# Altium PCB CBCM PCB Rev 1.PcbDoc
Units mm, origin at the board's own origin, x right, y up, seen from the top; angles counter-clockwise.
Board outline 102 x 53 mm, 4 copper layers (Component Side, Power, Ground, Solder Side), stack 0.651 mm thick; 35 components, 59 nets, 239 pads, 28 vias.
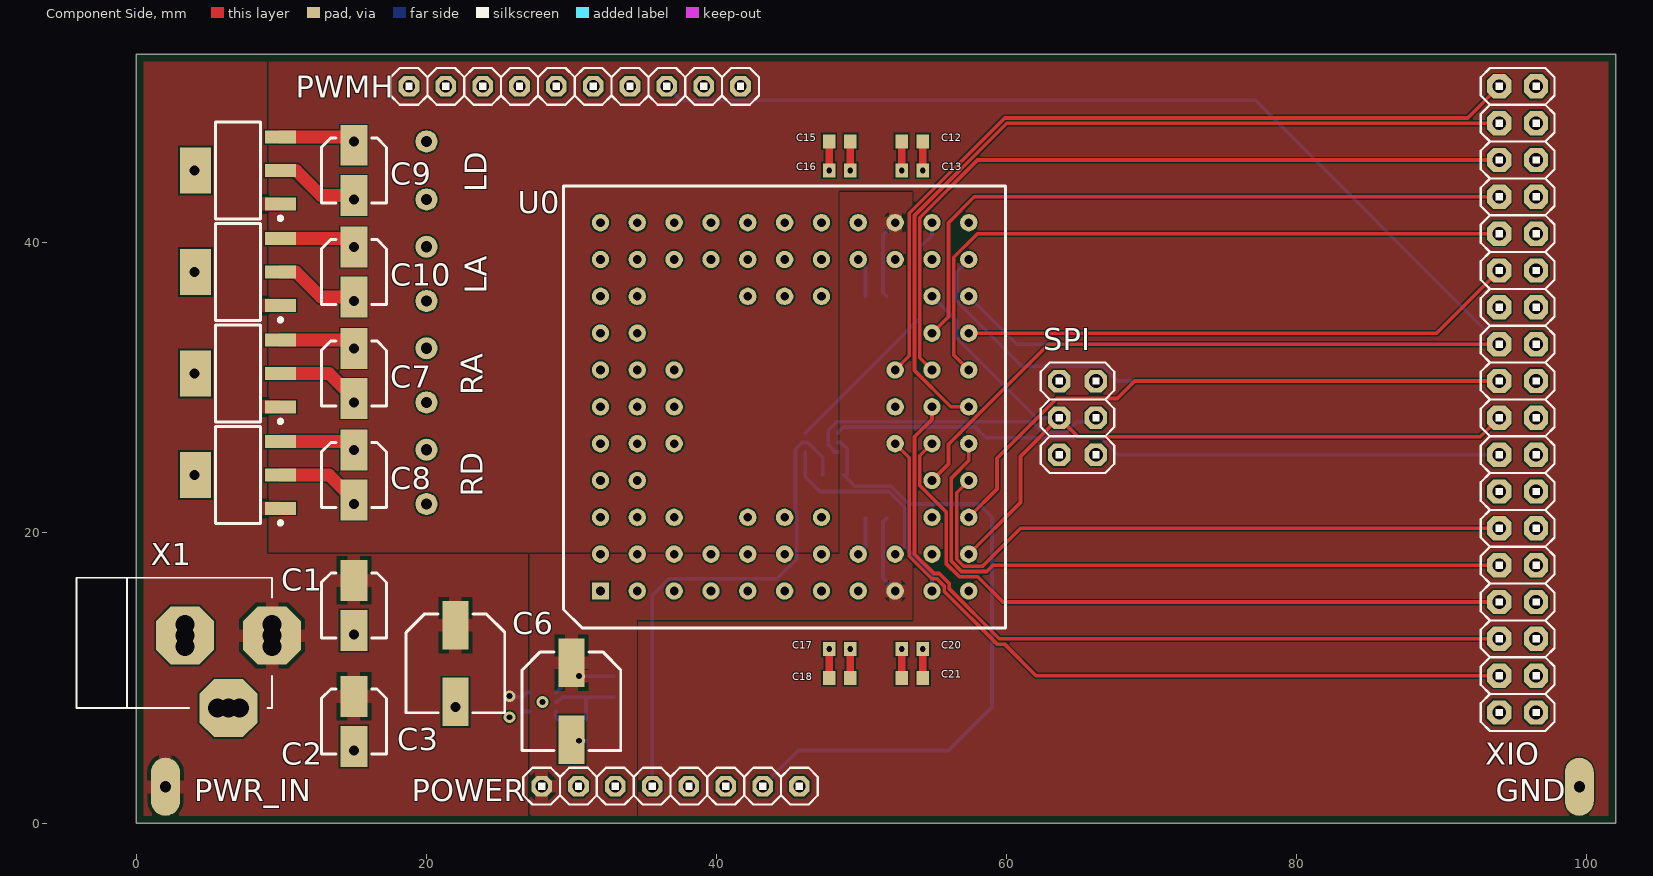
[diagram p0: Component Side view]
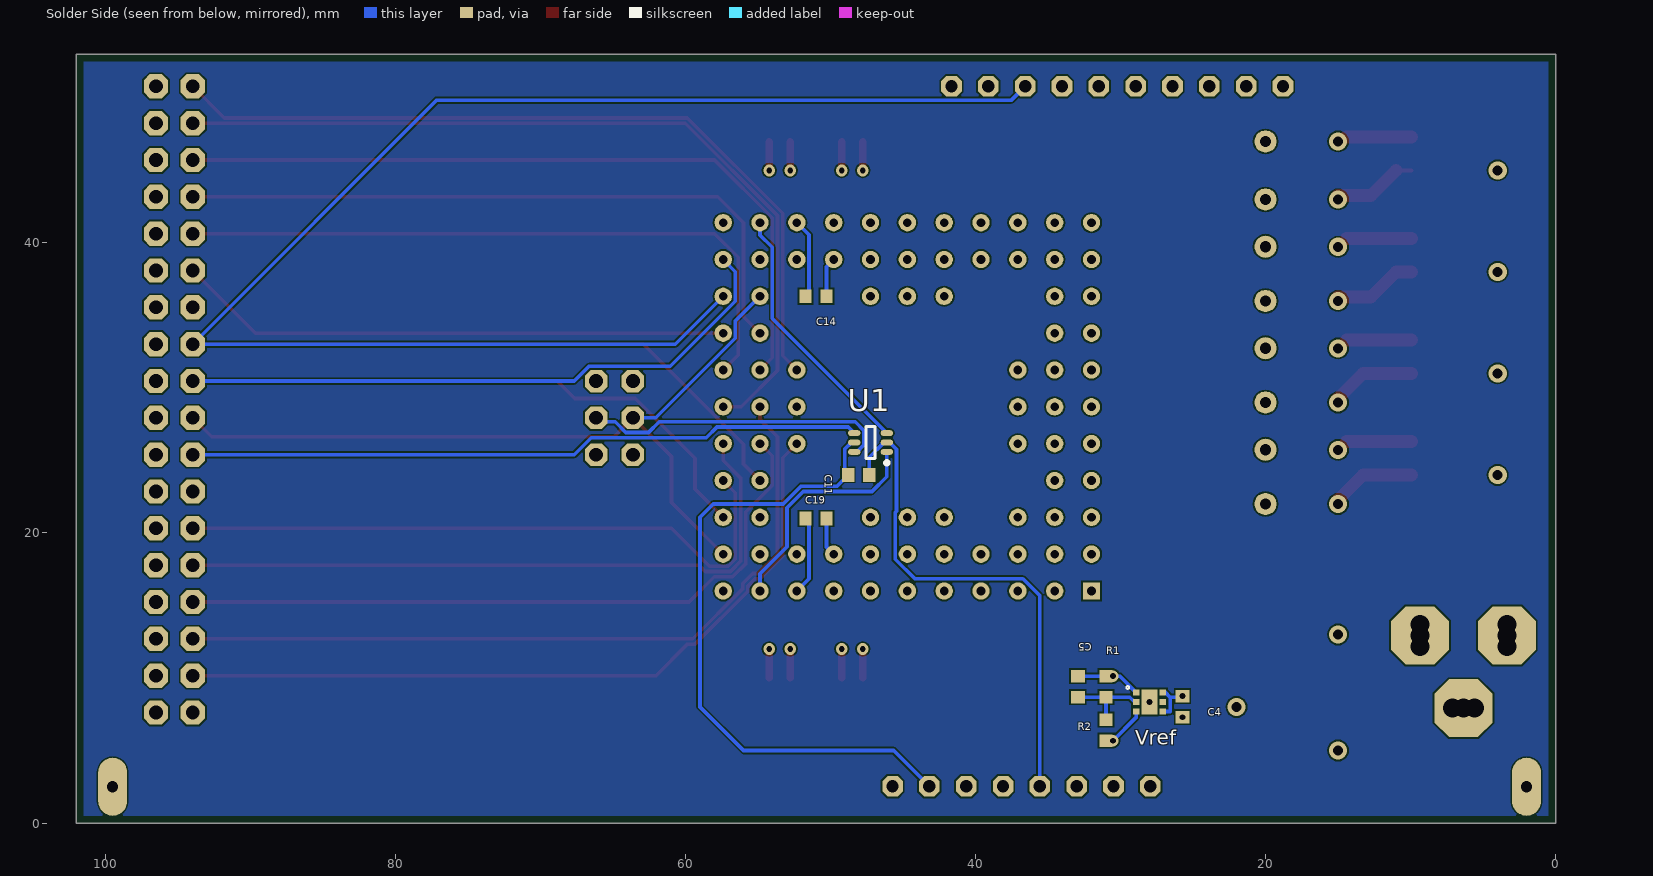
[diagram p1: Solder Side view, seen from below]
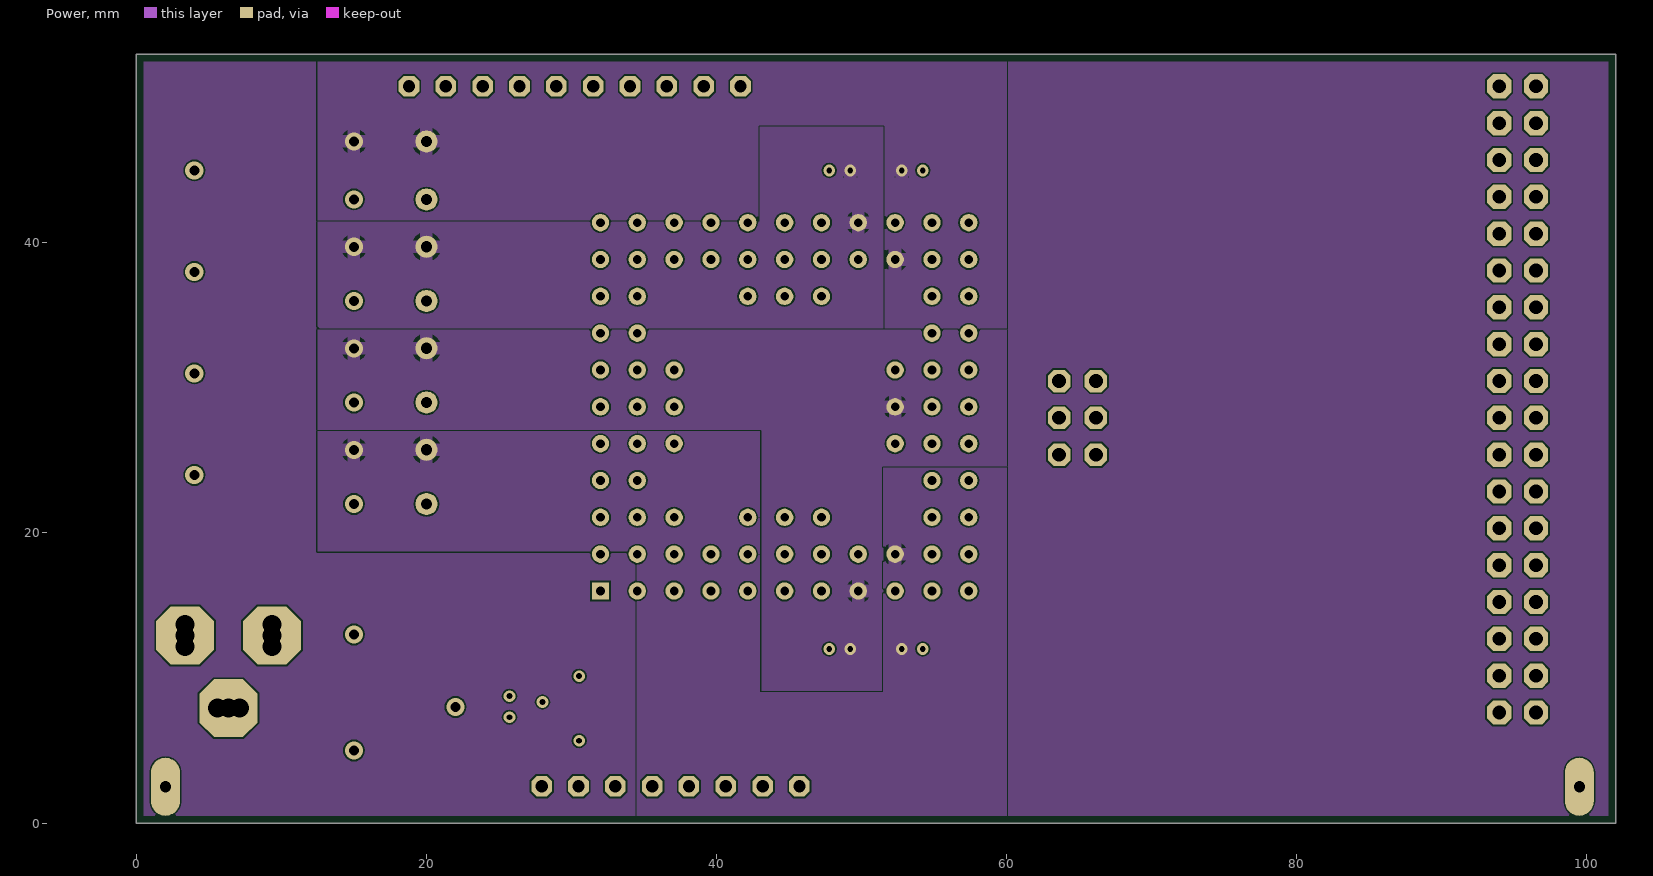
[diagram p2: Power]
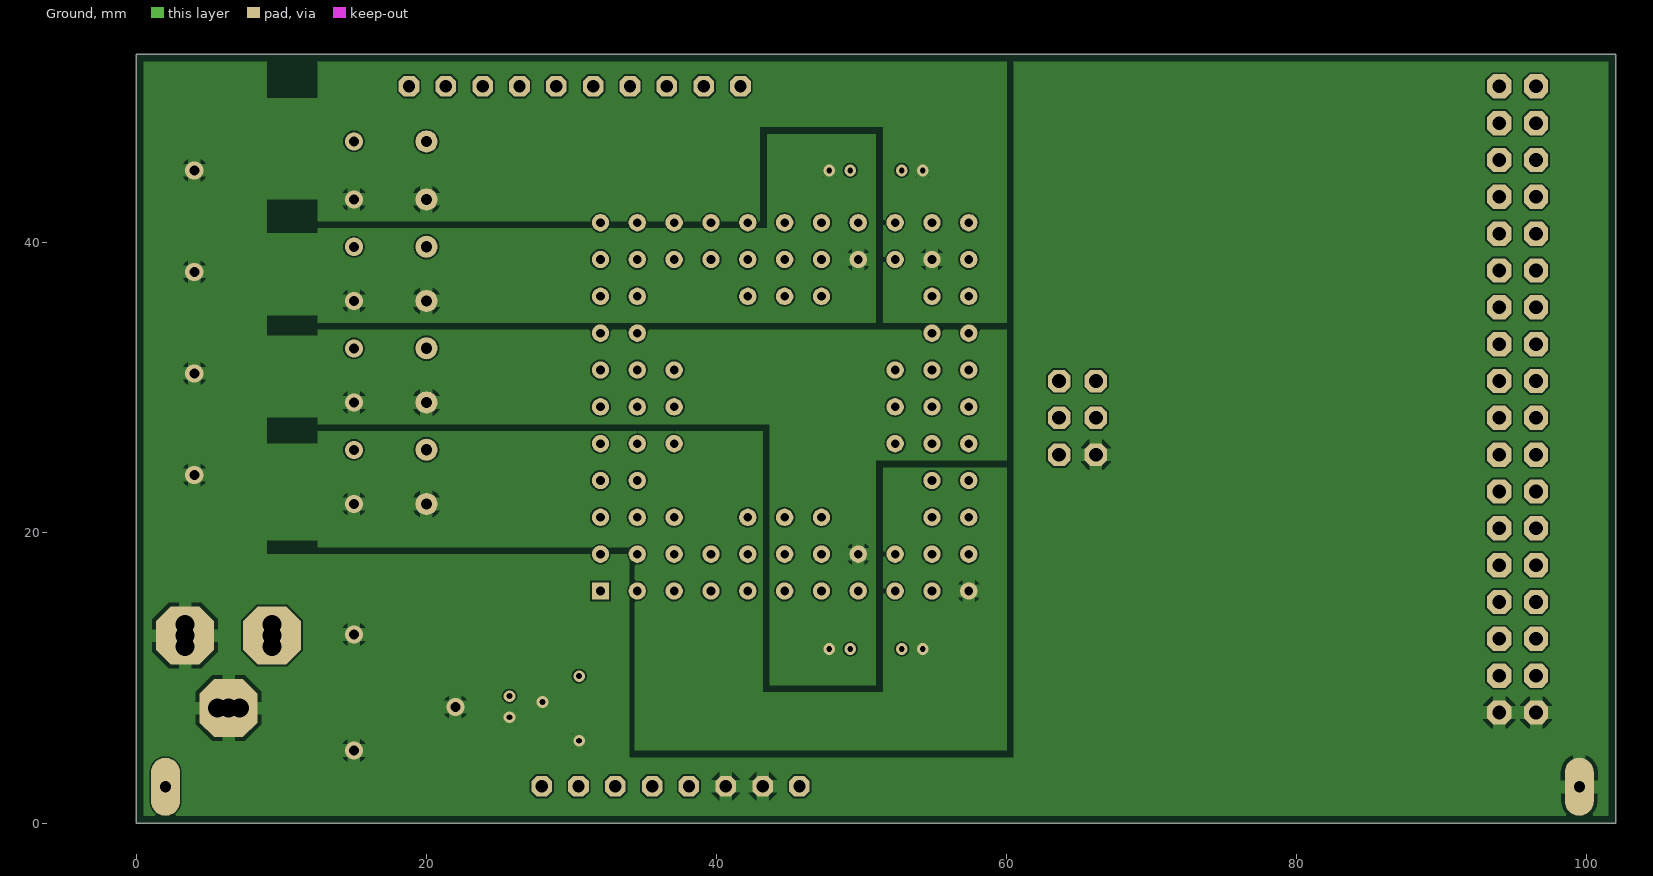
[diagram p3: Ground]
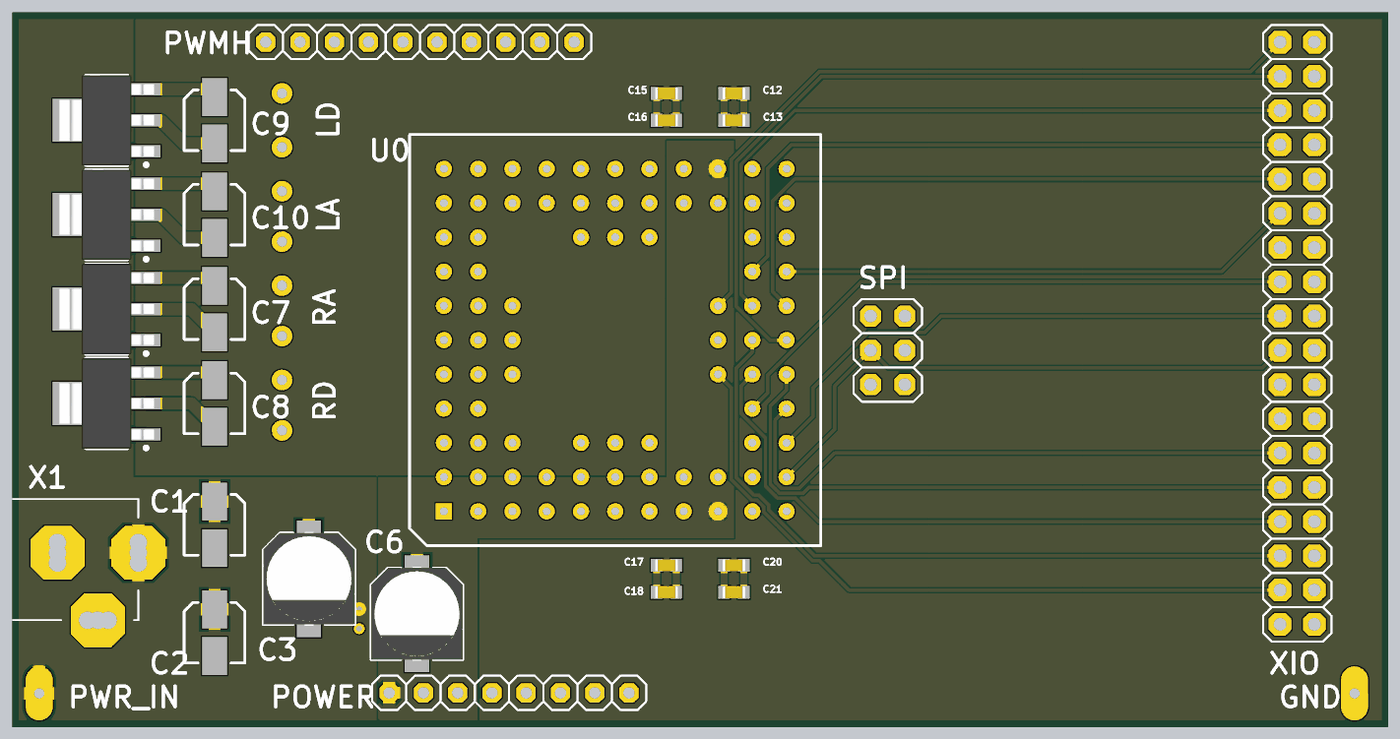
[diagram p4: 3D render of the assembled board from above, using the file's embedded part models]
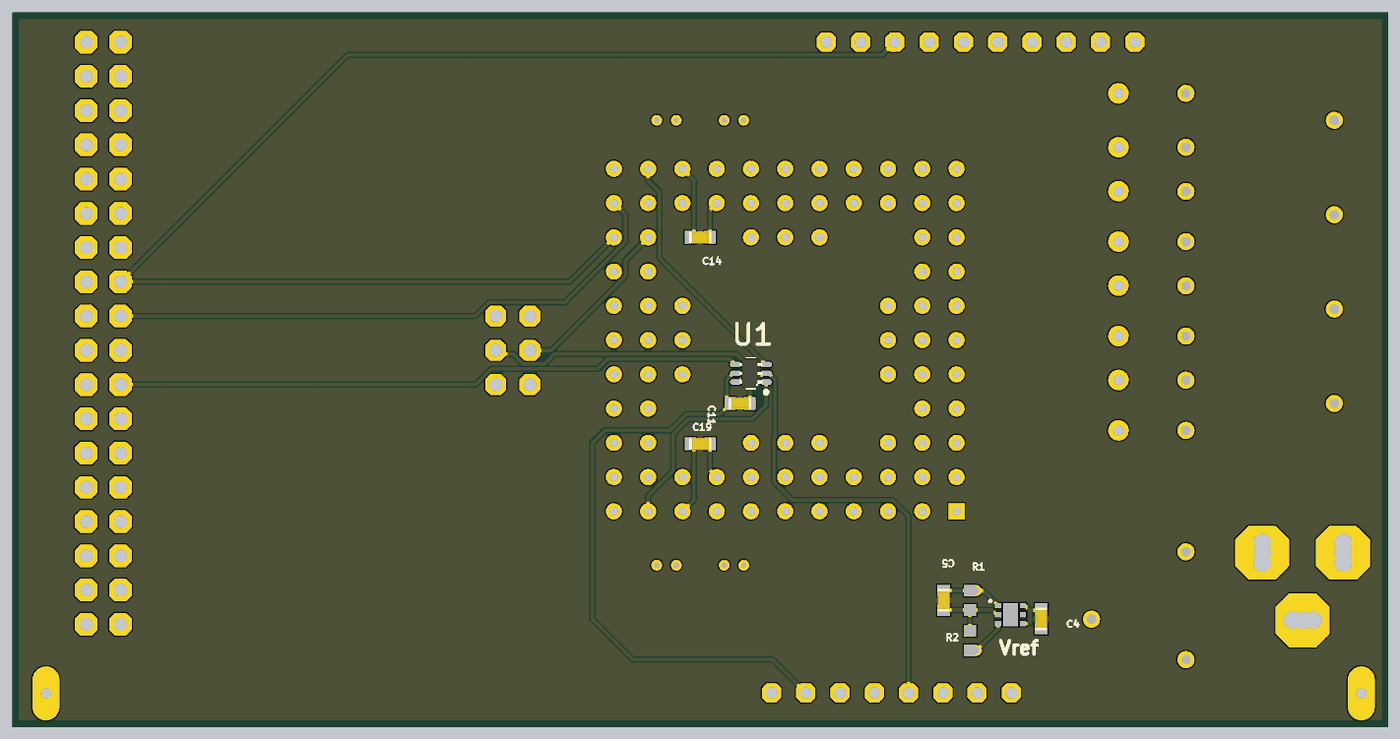
[diagram p5: 3D render of the assembled board from below, using the file's embedded part models]

## Layer stack, top to bottom
Top Solder: solder mask 0.0102, Solder Resist, Dk 3.5
Component Side: signal copper 0.0356
Dielectric 1: prepreg 0.127, Dk 4.2
Power: signal copper 0.036
Dielectric 3: core 0.254, FR-4, Dk 4.2
Ground: signal copper 0.036
Dielectric 2: prepreg 0.127, Dk 4.2
Solder Side: signal copper 0.0356
Bottom Solder: solder mask 0.0102, Solder Resist, Dk 3.5

## Board outline
0,0 102,0 102,53 0,53

## Design rules (kind name [scope] priority, off if disabled: settings)
Clearance [All] p1: gap=0.11 ignorepadtopadclearanceinfootprint=FALSE except(0: Arc-Hole Track-Hole SMDPad-Hole THPad-Hole Via-Hole Fill-Hole Poly-Hole Region-Hole Text-Hole)
PolygonConnect [All] p1: connectstyle=Relief reliefconductorwidth=0.9 reliefentries=4 polygonreliefangle="90 Angle" airgapwidth=0.254
RoutingVias [All] p1: holewidth=0.711 width=1.27 viastyle="Through Hole" minholewidth=0.711 minwidth=1.27 maxholewidth=0.711 maxwidth=1.27
SolderMaskExpansion [All] p1: expansion=0.102
Width [All] p1: maxlimit=2 minlimit=0.16 preferedwidth=0.254 midlayer1_maxwidth=0.254 midlayer2_maxwidth=0.254 minimp=50.000000 maximp=50.000000 favimp=50.000000
30 further rules are at their usual default settings.

## Components (designator, comment, footprint, x,y, rotation, side; value= is the part's Value field where it differs from the comment)
C1 "10uF" CAPAE4643X55M 15,15 r270 top
C2 "47uF" CAPAE4643X55M 15,7 r270 top
C3 "100uF" CAPAE7066X77M 22,11 r270 top
C4 "1uF" CAPC1608X09N 25.725,8.024 r270 bottom
C5 "10nF" CAPC1608X09N 32.94,9.404 r90 bottom
C6 "100uF" CAPAE7066X77M 30,8.404 r270 top
C7 "10uF" CAPAE4643X55M 15,31 r270 top
C8 "10uF" CAPAE4643X55M 15,24 r270 top
C9 "10uF" CAPAE4643X55M 15,45 r270 top
C10 "10uF" CAPAE4643X55M 15,38 r270 top
C11 "0.1uF" CAPC1608X09N 48.054,24 r180 bottom
C12 "0.1uF" CAPC1608X09N 53.5,47 r0 top
C13 "1uF" CAPC1608X09N 53.5,45 r0 top
C14 "1uF" CAPC1608X09N 51,36.32 r0 bottom
C15 "0.1uF" CAPC1608X09N 48.5,47 r180 top
C16 "1uF" CAPC1608X09N 48.5,45 r180 top
C17 "1uF" CAPC1608X09N 48.5,12 r0 top
C18 "0.1uF" CAPC1608X09N 48.5,10 r0 top
C19 "1uF" CAPC1608X09N 51,21 r180 bottom
C20 "1uF" CAPC1608X09N 53.5,12 r180 top
C21 "0.1uF" CAPC1608X09N 53.5,10 r180 top
LA "UA78M33QDCYRQ1" SOT230P700X180-4N 7,38 r180 top (schematic designator LAVDD)
LD "UA78M33QDCYRQ1" SOT230P700X180-4N 7,45 r180 top (schematic designator LDVDD)
POWER "8x1F-H8.5" 1X08 36.83,2.54 r0 top locked
PWMH "10x1F-H8.5" 1X10 30.226,50.8 r180 top locked
R1 "130k" RESC1608X09N 31,9.404 r90 bottom
R2 "98.8k" RESC1608X09N 31,6.404 r90 bottom
RA "UA78M33QDCYRQ1" SOT230P700X180-4N 7,31 r180 top (schematic designator RAVDD)
RD "UA78M33QDCYRQ1" SOT230P700X180-4N 7,24 r180 top (schematic designator RDVDD)
SPI "3x2M" 2X03 64.897,27.94 r270 top locked
U0 "CBCM IC" PGA85x11 32,16 r90 top locked
U1 "TMUX1247" TSOP65P210X110-6N 47.24,26.24 r0 bottom
Vref "NCP705MTADJTCG" WDFN6 28,8.344 r270 bottom
X1 "POWERSUPPLY_DC21MMX" POWERSUPPLY_DC-21MM 3,13 r90 top
XIO "18x2F-H8.5" 2X18 95.25,29.21 r270 top locked

## Footprints (in the part's own frame and the unit in brackets; to place one, negate y for a bottom-side part, rotate by r counter-clockwise, add the part's x,y. Pads: shape width x height; smd on the part's side, far side on the other; paste and mask are expansions set on the pad)
1X08 [mil]
  oct 56x56 hole 33.46: 1(-350,0) 2(-250,0) 3(-150,0) 4(-50,0) 5(50,0) 6(150,0) 7(250,0) 8(350,0)
  silkscreen extent -400,-50 400,50
1X10 [mil]
  oct 56x56 hole 33.46: 1(-450,0) 2(-350,0) 3(-250,0) 4(-150,0) 5(-50,0) 6(50,0) 7(150,0) 8(250,0) 9(350,0) 10(450,0)
  silkscreen extent -500,-50 500,50
2X03 [mm]
  oct 1.55x1.55 hole 0.95: 1(-2.54,-1.27) 2(-2.54,1.27) 3(0,-1.27) 4(0,1.27) 5(2.54,-1.27) 6(2.54,1.27)
  silkscreen extent -3.81,-2.54 3.81,2.54
2X18 [mil]
  oct 66x66 hole 37.4: 1(-850,-50) 2(-850,50) 3(-750,-50) 4(-750,50) 5(-650,-50) 6(-650,50) 7(-550,-50) 8(-550,50) 9(-450,-50) 10(-450,50) 11(-350,-50) 12(-350,50) 13(-250,-50) 14(-250,50) 15(-150,-50) 16(-150,50) 17(-50,-50) 18(-50,50) 19(50,-50) 20(50,50) 21(150,-50) 22(150,50) 23(250,-50) 24(250,50) 25(350,-50) 26(350,50) 27(450,-50) 28(450,50) 29(550,-50) 30(550,50) 31(650,-50) 32(650,50) 33(750,-50) 34(750,50) 35(850,-50) 36(850,50)
  silkscreen extent -900,-100 900,100
CAPAE4643X55M [mm] "Aluminum Electrolytic Capacitor, Body 4.30x4.30x5.50mm, IPC Low Density"
  rect 2.8x1.85 smd: 1(-1.725,0) 2(1.725,0)
  silkscreen extent -2.25,-2.25 2.25,2.25, body extent -2.25,-2.25 2.25,2.25, height 5.5
CAPAE7066X77M [mm] "Aluminum Electrolytic Capacitor, Body 6.60x6.60x7.70mm, IPC Low Density"
  rect 3.35x1.8 smd: 1(-2.65,0) 2(2.65,0)
  silkscreen extent -3.4,-3.4 3.4,3.4, body extent -3.47,-3.4 3.47,3.4, height 7.7
CAPC1608X09N [mm] "Chip Capacitor, 2-Leads, Body 1.60x0.80mm, IPC Medium Density"
  rect 0.85x0.95 smd: 1(-0.725,0) 2(0.725,0)
  body extent -0.85,-0.45 0.85,0.45, height 0.9
PGA85x11 [mm]
  rect 1.2x1.2 hole 0.6: A1(0,0)
  round 1.2 hole 0.6: A2(2.54,0) A3(5.08,0) A4(7.62,0) A5(10.16,0) A6(12.7,0) A7(15.24,0) A8(17.78,0) A9(20.32,0) A10(22.86,0) A11(25.4,0) B1(0,-2.54) B2(2.54,-2.54) B3(5.08,-2.54) B4(7.62,-2.54) B5(10.16,-2.54) B6(12.7,-2.54) B7(15.24,-2.54) B8(17.78,-2.54) B9(20.32,-2.54) B10(22.86,-2.54) B11(25.4,-2.54) C1(0,-5.08) C2(2.54,-5.08) C3(5.08,-5.08) C5(10.16,-5.08) C6(12.7,-5.08) C7(15.24,-5.08) C10(22.86,-5.08) C11(25.4,-5.08) D1(0,-7.62) D2(2.54,-7.62) D10(22.86,-7.62) D11(25.4,-7.62) E1(0,-10.16) E2(2.54,-10.16) E3(5.08,-10.16) E9(20.32,-10.16) E10(22.86,-10.16) E11(25.4,-10.16) F1(0,-12.7) F2(2.54,-12.7) F3(5.08,-12.7) F9(20.32,-12.7) F10(22.86,-12.7) F11(25.4,-12.7) G1(0,-15.24) G2(2.54,-15.24) G3(5.08,-15.24) G9(20.32,-15.24) G10(22.86,-15.24) G11(25.4,-15.24) H1(0,-17.78) H2(2.54,-17.78) H10(22.86,-17.78) H11(25.4,-17.78) J1(0,-20.32) J2(2.54,-20.32) J5(10.16,-20.32) J6(12.7,-20.32) J7(15.24,-20.32) J10(22.86,-20.32) J11(25.4,-20.32) K1(0,-22.86) K2(2.54,-22.86) K3(5.08,-22.86) K4(7.62,-22.86) K5(10.16,-22.86) K6(12.7,-22.86) K7(15.24,-22.86) K8(17.78,-22.86) K9(20.32,-22.86) K10(22.86,-22.86) K11(25.4,-22.86) L1(0,-25.4) L2(2.54,-25.4) L3(5.08,-25.4) L4(7.62,-25.4) L5(10.16,-25.4) L6(12.7,-25.4) L7(15.24,-25.4) L8(17.78,-25.4) L9(20.32,-25.4) L10(22.86,-25.4) L11(25.4,-25.4)
  silkscreen extent -2.54,-27.94 27.94,2.54
POWERSUPPLY_DC-21MM [mm]
  oct 4x4 hole 1.3: 1(-5.08,-3.353) 2(-0.076,-6.35) 3(-0.076,-0.356)
  round 1.95 hole 1.3: 4(-5.08,-4.115) 5(-5.08,-2.591) 6(-0.838,-0.356) 7(0.686,-0.356) 8(-0.838,-6.35) 9(0.686,-6.35)
  silkscreen extent -5.08,-6.35 3.91,7.14
RESC1608X09N [mm] "Chip Resistor, 2-Leads, Body 1.60x0.80mm, IPC Medium Density"
  rect 0.85x0.9 smd: 1(-0.725,0) 2(0.725,0)
  body extent -0.85,-0.45 0.85,0.45, height 0.9
SOT230P700X180-4N [mm] "SOT223, 4-Leads, Body 6.50x7.00mm (avg), Pitch 2.30mm, IPC Medium Density"
  rect 2.15x0.9 smd: 1(-2.925,2.3) 2(-2.925,0) 3(-2.925,-2.3)
  rect 2.15x3.2 smd: 4(2.925,0)
  silkscreen extent -3.05,-3.35 1.55,3.42, body extent -3.5,-3.35 3.5,3.35, height 1.8
TSOP65P210X110-6N [mm] "TSOP, 6-Leads, Body 2.00x1.25mm, Pitch 0.65mm, IPC Medium Density"
  oval 0.85x0.4 smd: 1(-1.125,0.65) 2(-1.125,0) 3(-1.125,-0.65) 4(1.125,-0.65) 5(1.125,0) 6(1.125,0.65)
  silkscreen extent -1.25,-1.1 0.3,1.52, body extent -0.85,-1.1 0.85,1.1, height 1.1
WDFN6 [mm]
  rect 0.4x0.45 smd: 1(-0.66,-0.925) 2(0,-0.925) 3(0.66,-0.925) 4(0.66,0.925) 5(0,0.925) 6(-0.66,0.925)
  rect 1.72x1.12 smd: GND(0,0)
  silkscreen extent -1.1,-1.6 -0.9,-1.4

## Part data
C1 C2 C7 C8 C9 C10: library part Electrolytic_CAP(4.0x5.5)
C3 C6: library part Electrolytic_CAP(6.3x7.7)
C4 C5 C11 C12 C13 C14 C15 C16 C17 C18 C19 C20 C21: library part CAP0603
POWER: library part PINHD-1X8
PWMH: library part PINHD-1X10
R1 R2: library part RES0603
SPI: library part PINHD-2X3
Vref: "500 mA, Ultra-Low  Quiescent Current, IQ 13 A,  Ultra-Low Noise, LDO  Voltage Regulator", Manufacturer="ON Semiconductor", Digi-Key link=https://www.digikey.ca/product-detail/en/on-semiconductor/NCP705MTADJTCG/NCP705MTADJTCGOSCT-ND/8538627, Manufacturer Part Number=NCP705MTADJTCG
XIO: library part PINHD-2X18

## Free pads (board coordinates)
  oval 2x4 hole 0.762: 2(2,2.5) 4(99.5,2.5)
  round 1.524 hole 0.762: 5(20,22) 6(20,25.74) 7(20,29) 8(20,32.74) 9(20,36) 10(20,39.74) 11(20,43) 12(20,47)

## Via types
v1: diameter 1.27, hole 0.711, Component Side to Solder Side, 15 vias
v2: diameter 0.8, hole 0.4, Component Side to Solder Side, 13 vias

## Nets (pads, with @x,y where several pads share a name; then routed paths per layer and width w, separated by ;. In a path a pad name is that pad's centre, name@x,y a point inside that pad or via, vN(x,y) a via of type N, cw(c..) or ccw(c..) an arc to the next point about the centre after c; other vN are vias at no path point)
COMMON_GND: C1.2 C2.2 C3.2 C4.2 C6.2 C7.2 C8.2 C9.2 C10.2 C11.1 C12.2 C13.2 C14.1 C15.2 C16.2 C17.1 C18.1 C19.2 C20.1 C21.1 LA.2 LA.4 LD.2 LD.4 pad.4 pad.5 pad.7 pad.9 pad.11 POWER.6 POWER.7 R2.1 RA.2 RA.4 RD.2 RD.4 SPI.6 U0.H2 U0.H10 U0.K10 U0.L1 U1.5 Vref.3 Vref.GND X1.1 X1.3 X1.4 X1.5 X1.6 X1.7 XIO.35 XIO.36 | length 85.2
  Component Side w0.254: LD.2 LD.2@11,45
  Component Side w0.5: C18.1 v2(47.775,12) ; v2(47.775,45) C15.2 ; C21.1 v2(54.225,12) ; v2(54.225,45) C12.2
  Component Side w0.9: RD.2 13.275,24 C8.2 ; RA.2 13.275,31 C7.2 ; LA.2 11,38 12.725,36.275 C10.2 ; LD.2@11,45 12.725,43.275 C9.2
  Solder Side w0.254: Vref.3 28.925,7.279 v2(30.525,5.679) R2.1 ; POWER.7 45.64,5 56,5 59,8 59,21.08 58.08,22 53.254,22 52.03,23.224 49.555,23.224 C11.1 49.027,24 49.027,25.771 48.558,26.24 U1.5 ; U0.H2 50.275,19.035 C19.2 ; U0.H10 50.275,38.365 C14.1
  other v1: 15,5 22,8 15,13 15,22 4,24 15,29 4,31 15,36 4,38 15,43 4,45
  other v2: 25.725,7.299 28,8.344
G1-L: U0.L6 XIO.3 | length 58.4
  Component Side w0.254: U0.L6 56.16,28.7 53.659,31.201 53.659,41.897 60.022,48.26 XIO.3
G1-R: U0.K5 XIO.29 | length 48.7
  Component Side w0.254: U0.K5 54.023,25.323 54.023,23.273 55.835,21.461 55.835,17.892 56.752,16.975 58.025,16.975 59.76,15.24 XIO.29 XIO.29@93.903,15.163
G2-L: U0.L8 XIO.11 | length 38.9
  Component Side w0.254: U0.L8@57.053,33.433 U0.L8 89.66,33.78 XIO.11
G2-R: U0.J5 XIO.33 | length 52.5
  Component Side w0.254: U0.J5 53.295,25.185 53.295,18.389 54.847,16.837 55.207,16.837 55.697,16.347 55.697,15.987 59.348,12.336 59.863,12.336 62.039,10.16 XIO.33
G3-L: U0.K8 XIO.7 | length 46.8
  Component Side w0.254: U0.K8 56,34.92 56,41.4 57.78,43.18 XIO.7
G3-R: U0.L4 XIO.25 | length 44.5
  Component Side w0.254: U0.L4 56.563,22.783 56.563,18.193 57.053,17.703 58.351,17.703 60.968,20.32 XIO.25
LAVDD: C10.1 C15.1 C16.1 LA.3 pad.10 U0.H11 | length 7.3
  Component Side w0.254: C10.1@14.425,40.3 v1(15,39.725)
  Component Side w0.5: v2(49.225,45) C15.1
  Component Side w0.9: LA.3 C10.1@14.425,40.3
LDVDD: C9.1 C12.1 C13.1 LD.3 pad.12 U0.J10 | length 7.3
  Component Side w0.254: C9.1@14.425,47.3 C9.1
  Component Side w0.5: v2(52.775,45) C12.1
  Component Side w0.9: LD.3 C9.1@14.425,47.3
  other v1: 15,47
LNout: U0.K11 U1.3 | length 18.1
  Solder Side w0.254: U1.3 54.023,34.798 54.023,39.697 54.86,40.534 U0.K11
NetC1_1: C1.1 C2.1 C3.1 C4.1 LA.1 LD.1 pad.2 RA.1 RD.1 Vref.4 Vref.6 X1.2 X1.8 X1.9 | length 6.1
  Component Side w0.254: X1.2@8.088,11.639 X1.2@8.088,12.924 ; X1.2@8.088,14.209 X1.2@8.088,12.924 ; X1.2@8.327,12.924 X1.2@8.088,12.924
  Solder Side w0.254: X1.2@8.088,12.924 X1.2@8.327,12.924 ; v2(25.725,8.749) 25.725,8.663 26.563,8.663 ; Vref.4 26.563,7.684 26.563,8.663 ; Vref.6 26.904,9.004 26.563,8.663
NetC5_1: C5.1 R1.1 R2.2 Vref.2 | length 5.7
  Solder Side w0.254: Vref.2 29.025,8.344 29.36,8.679 R1.1 ; R2.2 R1.1 ; C5.1 R1.1
NetPOWER_2: POWER.2
NetPOWER_3: POWER.3
NetPOWER_5: POWER.5
NetPOWER_8: POWER.8
NetPWMH_1: PWMH.1
NetPWMH_2: PWMH.2
NetPWMH_4: PWMH.4
NetPWMH_5: PWMH.5
NetPWMH_6: PWMH.6
NetPWMH_7: PWMH.7
NetPWMH_8: PWMH.8
NetPWMH_9: PWMH.9
NetPWMH_10: PWMH.10
NetXIO_2: XIO.2
NetXIO_4: XIO.4
NetXIO_6: XIO.6
NetXIO_8: XIO.8
NetXIO_10: XIO.10
NetXIO_12: XIO.12
NetXIO_13: XIO.13
NetXIO_14: XIO.14
NetXIO_16: XIO.16
NetXIO_18: XIO.18
NetXIO_20: XIO.20
NetXIO_22: XIO.22
NetXIO_23: XIO.23
NetXIO_24: XIO.24
NetXIO_26: XIO.26
NetXIO_28: XIO.28
NetXIO_30: XIO.30
NetXIO_32: XIO.32
NetXIO_34: XIO.34
Nout: SPI.4 U1.6 | length 20.8
  Solder Side w0.254: U1.6 48.172,25.59 47.703,26.059 47.703,27.071 48.3,27.668 61.814,27.668 62.554,26.928 64.113,26.928 64.852,27.668 SPI.4@65.728,27.668
phi1: PWMH.3 U0.K4 U0.L9 XIO.15 | length 146.5
  Component Side w0.254: U0.K4 56,24.76 56,26.116 62.904,33.02 XIO.15
  Solder Side w0.254: PWMH.3 37.524,49.852 77.148,49.852 XIO.15 60.7,33.02 U0.L9
phi2: U0.L3 U0.L10 XIO.17 | length 84.6
  Component Side w0.254: U0.L3 59.348,23.028 59.348,25.159 63.464,29.275 67.639,29.275 68.844,30.48 XIO.17
  Solder Side w0.254: U0.L10 56.563,38.023 56.563,35.973 61.044,31.492 66.653,31.492 67.665,30.48 XIO.17
phi3: SPI.3 U0.K9 U0.L2 XIO.19 | length 55.8
  Component Side w0.254: U0.L2 60.968,22.108 60.968,25.281 SPI.3 64.934,26.633 92.673,26.633 XIO.19
  Solder Side w0.254: U0.K9 56.563,34.617 56.563,33.433 62.056,27.94 SPI.3@63.112,27.94
RAVDD: C7.1 C17.2 C18.2 pad.8 RA.3 U0.H1 U0.J6 | length 7.3
  Component Side w0.254: C7.1@14.425,33.3 v1(15,32.725)
  Component Side w0.5: C18.2 v2(49.225,12)
  Component Side w0.9: RA.3 C7.1@14.425,33.3
RDVDD: C8.1 C20.2 C21.2 pad.6 RD.3 U0.J2 | length 7.3
  Component Side w0.254: C8.1@14.425,26.3 v1(15,25.725)
  Component Side w0.5: C21.2 v2(52.775,12)
  Component Side w0.9: RD.3 C8.1@14.425,26.3
RNout: U0.K1 U1.1 | length 16
  Solder Side w0.254: U1.1 46.115,23.885 47.14,22.86 51.879,22.86 53,21.739 53,19.044 54.86,17.184 U0.K1
Sclk-L: U0.K7 XIO.5 | length 52.6
  Component Side w0.254: U0.K7@54.672,31.24 U0.K7 54.023,32.077 54.023,41.747 57.996,45.72 XIO.5
Sclk-R: U0.L5 XIO.27 | length 46.9
  Component Side w0.254: U0.L5 57.4,25 56.199,23.799 56.199,18.043 56.903,17.339 58.636,17.339 59.077,17.78 XIO.27 XIO.27@93.98,17.703
SEL: U1.4 XIO.21 | length 46.6
  Solder Side w0.254: U1.4 48.779,27.304 57.829,27.304 58.569,26.564 66.501,26.564 67.665,25.4 XIO.21
Sin-L: U0.L7 XIO.9 | length 46.6
  Component Side w0.254: U0.L7 56.364,32.276 56.364,39.008 57.996,40.64 XIO.9 XIO.9@93.98,40.563
Sin-R: U0.K6 XIO.31 | length 54
  Component Side w0.254: U0.K6@54.51,28.7 U0.K6 54.86,27.834 53.659,26.633 53.659,18.54 54.998,17.201 55.357,17.201 56.061,16.497 56.061,16.138 59.499,12.7 XIO.31
Test_Pin: U0.J7 XIO.1 | length 55.5
  Component Side w0.254: U0.J7 53.295,32.215 53.295,42.048 59.871,48.624 91.804,48.624 XIO.1
uC_3V3: C11.2 POWER.4 U1.2 | length 35.5
  Solder Side w0.254: POWER.4 35.56,15.664 36.733,16.837 44.181,16.837 45.537,18.193 45.537,21.427 45.453,21.511 45.453,25.771 45.922,26.24 U1.2 46.308,26.24 47.329,25.219 C11.2
Vref: C5.2 C6.1 C14.2 C19.1 POWER.1 R1.2 U0.J1 U0.J11 Vref.1 | length 15.5
  Solder Side w0.254: Vref.1 30.05,10.129 v2(30.525,10.129) R1.2 C5.2 ; C19.1 51.483,20.758 51.483,16.837 U0.J1 ; C14.2 51.483,36.562 51.483,40.563 U0.J11
pads on no net: SPI.1 SPI.2 SPI.5 U0.A1 U0.A2 U0.A3 U0.A4 U0.A5 U0.A6 U0.A7 U0.A8 U0.A9 U0.A10 U0.A11 U0.B1 U0.B2 U0.B3 U0.B4 U0.B5 U0.B6 U0.B7 U0.B8 U0.B9 U0.B10 U0.B11 U0.C1 U0.C2 U0.C3 U0.C5 U0.C6 U0.C7 U0.C10 U0.C11 U0.D1 U0.D2 U0.D10 U0.D11 U0.E1 U0.E2 U0.E3 U0.E9 U0.E10 U0.E11 U0.F1 U0.F2 U0.F3 U0.F9 U0.F10 U0.F11 U0.G1 U0.G2 U0.G3 U0.G9 U0.G10 U0.G11 U0.K2 U0.K3 U0.L11 Vref.5

## Polygon pours and split planes (outlines as drawn)
no net on Component Side "Component Side-No Net" (solid, pour order 50): 0.5,52.5 101.5,52.5 101.5,0.5 0.5,0.5
NetC1_1 on Component Side "Top Side-NetC1_1" (solid, pour order 0): 0.5,52.5 9,52.5 9,18.54 27,18.54 27,0.5 0.5,0.5
Vref on Component Side "Component Side-Vref" (solid, pour order 48): 26.535,18.54 26.535,0.5 34.5,0.5 34.5,1.04 34.5,14 53.5,14 53.5,43.5 48.5,43.5 48.5,18.54
COMMON_GND on Ground "Ground-COMMON_GND 8" (solid, pour order 2): 0.5,52.5 9,52.5 9,18.54 34,18.54 34,0.5 0.5,0.5
COMMON_GND on Ground "Ground-COMMON_GND 9" (solid, pour order 36): 8.595,26.16 13,26.16 13,19.5 8.685,19.5
COMMON_GND on Ground "Ground-COMMON_GND" (solid, pour order 34): 8.617,33.595 13,33.595 13,27.984 8.595,27.984
COMMON_GND on Ground "Ground-COMMON_GND 1" (solid, pour order 32): 8.685,40.684 13,40.684 13,35 8.685,35
COMMON_GND on Ground "Ground-COMMON_GND 2" (solid, pour order 30): 8.685,49.979 9.021,49.979 13,49.979 13,43 8.685,43
COMMON_GND on Ground "Ground-COMMON_GND 3" (solid, pour order 28): 33.92,4.5 60.5,4.5 60.5,52.5 101.5,52.5 101.5,0.5 34.011,0.5
COMMON_GND on Ground "Ground-COMMON_GND 4" (solid, pour order 26): 12.5,41.5 43,41.5 43,48 51.5,48 51.5,34.5 60,34.5 60,52.5 12.5,52.5
COMMON_GND on Ground "Ground-COMMON_GND 5" (solid, pour order 24): 12.5,34.5 51,34.5 51,47.5 43.5,47.5 43.5,41 12.5,41
COMMON_GND on Ground "Ground-COMMON_GND 6" (solid, pour order 22): 12.5,27 43.18,27 43.18,9 51.5,9 51.5,24.5 60,24.5 60,5 34.355,5 34.355,19 12.5,19
COMMON_GND on Ground "Ground-COMMON_GND 7" (solid, pour order 18): 12.5,34 60,34 60,25 51,25 51,9.5 43.663,9.5 43.663,27.5 12.5,27.5
no net on Ground "Ground-No Net" (solid, pour order 8): 12,27
no net on Ground "Ground-No Net 1" (solid, pour order 6): 25,12.55
no net on Ground "Ground-No Net 2" (solid, pour order 4): 25,13
no net on Solder Side "Solder Side-No Net 1" (solid, pour order 52): 0.5,52.5 101.5,52.5 101.5,0.5 0.5,0.5
no net on Solder Side "Solder Side-No Net" (solid, pour order 20): 12.5,27.5
no net on Power "Power-No Net" (solid, pour order 56): 0.5,52.5 101.5,52.5 101.5,0.5 0.5,0.5
LDVDD on Power "Power-LDVDD" (solid, pour order 44): 12.5,41.5 12.5,52.5 60,52.5 60,34 51.5,34 51.5,48 43,48 43,41.4
LAVDD on Power "Power-LAVDD" (solid, pour order 42): 12.5,34 51.5,34 51.5,48 43,48 43,41.45 12.5,41.45
RAVDD on Power "Power-RAVDD" (solid, pour order 40): 12.5,34 60,34 60,24.5 51.5,24.5 51.5,9 43,9 43,27 12.5,27
RDVDD on Power "Power-RDVDD" (solid, pour order 38): 12.5,27 12.5,18.725 34.5,18.725 34.5,0.5 60,0.5 60,24.5 51.5,24.5 51.5,9 43,9 43,27

## Silkscreen, mask and mechanical layers (free items; w line width, h text height)
Top Overlay:
  text "PWR_IN" at 4,1.5 h1.52
  text "GND" at 93.726,1.5 h1.52
Mechanical 1:
  the board outline again, w0.5